# EAGLE board transmitter receiver (EAGLE 6.5.0)
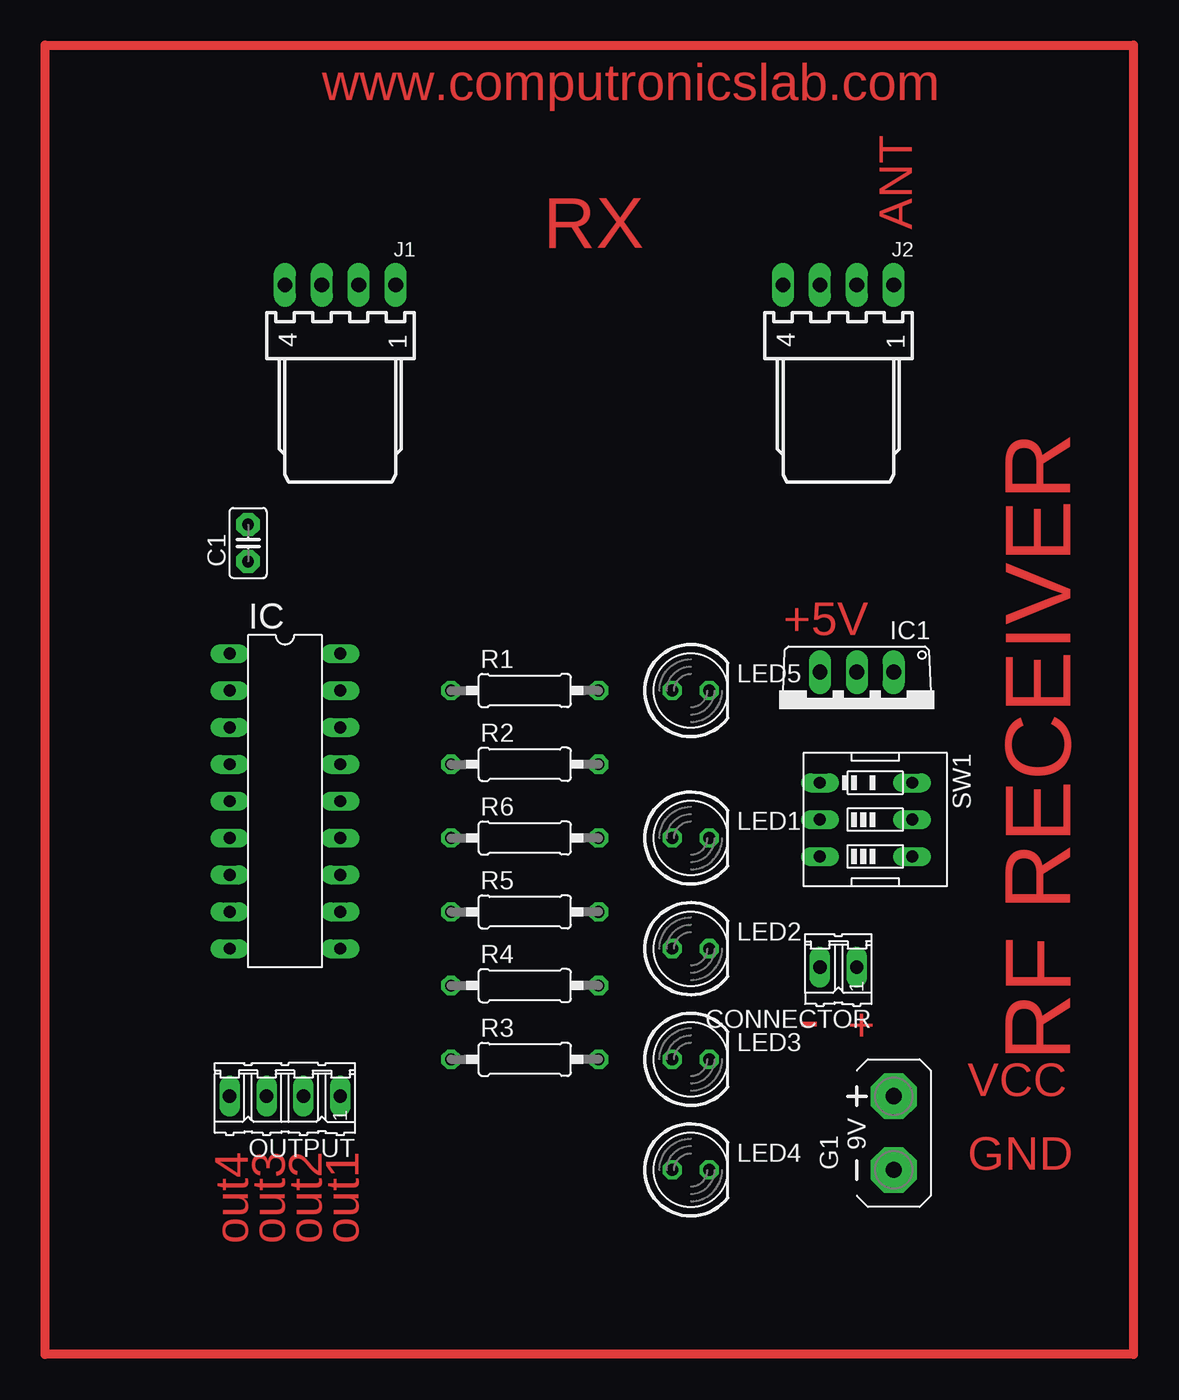
[diagram p0: board, top side]
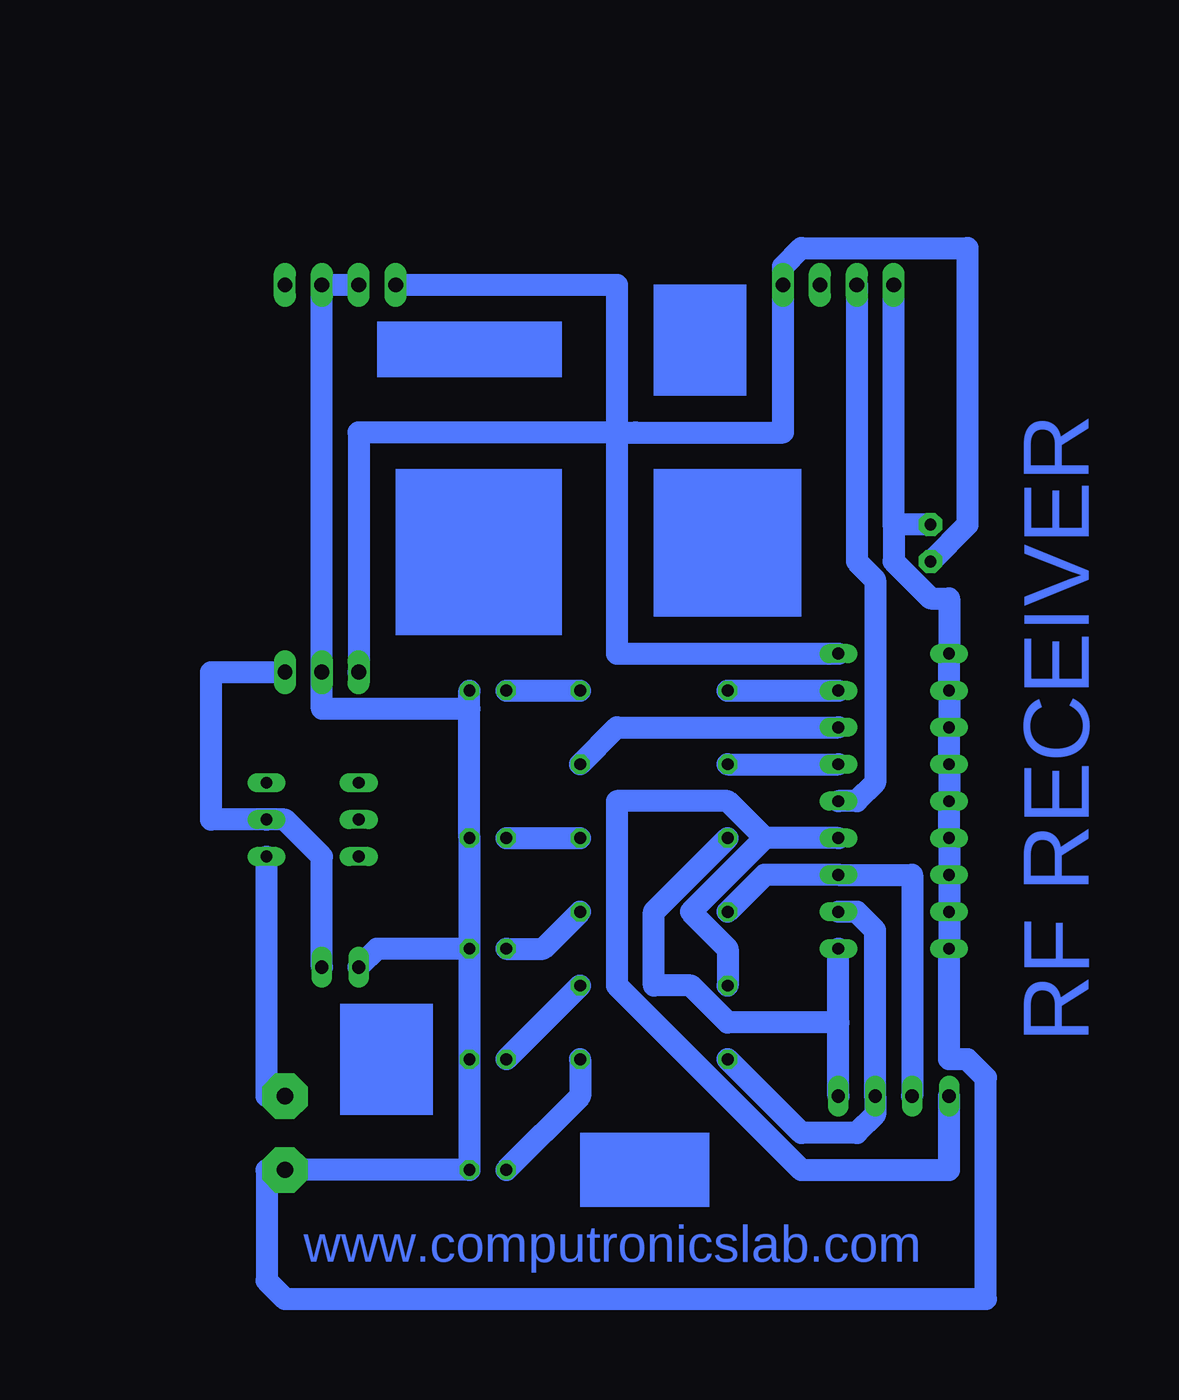
[diagram p1: board, bottom side, seen from below]

No outline drawn. Coordinates in mm, seen from the top.
Copper layers (1*16): Top 0.035mm / dielectric 1.5mm / Bottom 0.035mm
Design rules "default *": minimum track width 60mil, minimum drill 24mil, track to track 8mil, track to pad 8mil, pad to pad 8mil, via to via 8mil, smd to smd 8mil, copper to edge 40mil, drill to drill 8mil, minimum pad ring 10mil, minimum via ring 8mil, stop-mask expansion 4mil, vias tented up to drill 0mil, thermal gap 10mil

## Footprints (pad centres in the part's own frame; a part is rotated, then mirrored left to right if it is on the bottom)
C2.5-2 = drill 0.813 pad 1.6 octagon: 1 -1.27,0; 2 1.27,0
02P = drill 0.914 long: 1 -1.27,0; 2 1.27,0
AB9V = drill 1.118 pad 3.15 octagon: + 0,2.54; - 0,-2.54
DIL18 = drill 0.813 long: 1 -10.16,-3.81; 2 -7.62,-3.81; 3 -5.08,-3.81; 4 -2.54,-3.81; 5 0,-3.81; 6 2.54,-3.81; 7 5.08,-3.81; 8 7.62,-3.81; 9 10.16,-3.81; 10 10.16,3.81; 11 7.62,3.81; 12 5.08,3.81; 13 2.54,3.81; 14 0,3.81; 15 -2.54,3.81; 16 -5.08,3.81; 17 -7.62,3.81; 18 -10.16,3.81
TO220V = drill 1.016 long: 1 -2.54,-2.54; 2 0,-2.54; 3 2.54,-2.54
7395-04 = drill 1.016 long: 1 3.81,0; 2 1.27,0; 3 -1.27,0; 4 -3.81,0
LED5MM = drill 0.813 octagon: A -1.27,0; K 1.27,0
04P = drill 0.914 long: 1 -3.81,0; 2 -1.27,0; 3 1.27,0; 4 3.81,0
0207/10 = drill 0.813 octagon: 1 -5.08,0; 2 5.08,0
EDG-03 = drill 0.813 long: 1 -2.54,-3.81; 2 0,-3.81; 3 2.54,-3.81; 4 2.54,2.54; 5 0,2.54; 6 -2.54,2.54

## Placement (x,y rotation side)
C1  .01uf (103)  [C2.5-2]  24.13,58.42 90 top
CONNECTOR  2 pin  [02P]  64.77,29.21 180 top
G1  AB9V  [AB9V]  68.58,17.78 0 top
IC  HT12D  [DIL18]  26.67,40.64 270 top
IC1  7805TV  [TO220V]  66.04,46.99 180 top
J1  female conn  [7395-04]  30.48,76.2 0 top
J2  female conn  [7395-04]  64.77,76.2 0 top
LED1  5mm  [LED5MM]  54.61,38.1 0 top
LED2  5mm  [LED5MM]  54.61,30.48 0 top
LED3  5mm  [LED5MM]  54.61,22.86 0 top
LED4  5mm  [LED5MM]  54.61,15.24 0 top
LED5  5mm  [LED5MM]  54.61,48.26 0 top
OUTPUT  4 pin  [04P]  26.67,20.32 180 top
R1  330E  [0207/10]  43.18,48.26 0 top
R2  47K  [0207/10]  43.18,43.18 0 top
R3  330E  [0207/10]  43.18,22.86 0 top
R4  330E  [0207/10]  43.18,27.94 0 top
R5  330E  [0207/10]  43.18,33.02 0 top
R6  330E  [0207/10]  43.18,38.1 0 top
SW1  on/off switch  [EDG-03]  67.31,39.37 270 top

## Library data of the parts
C1 = capacitor-wima
CONNECTOR OUTPUT = con-amp-quick; OC_FARNELL: unknown; OC_NEWARK: unknown
G1 = battery
IC = microchip
IC1 = linear
J1 J2 = con-molex; OC_FARNELL: unknown; OC_NEWARK: unknown
LED1-LED5 = led
R1-R6 = eagle-ltspice; SPICEMODEL: NONE; SPICEPREFIX: R
SW1 = special

## Nets
FEMALECONN: IC.14 J1.3
N$1: LED3.A R4.2
N$2: LED2.A R5.2
N$3: LED4.A R3.2
N$4: LED1.A R6.2
N$5: IC.15 R2.1
N$6: IC.17 R1.1
N$7: LED5.A R1.2
N$8: IC.13 OUTPUT.4 R4.1
N$9: IC.12 OUTPUT.3 R5.1
N$10: IC.11 OUTPUT.2 R3.1
N$11: IC.10 OUTPUT.1 R6.1
N$12: C1.1 IC1.3 IC.18 J1.1 J2.4
N$15: C1.2 CONNECTOR.2 G1.- IC1.2 IC.1 IC.2 IC.3 IC.4 IC.5 IC.6 IC.7 IC.8 IC.9 J1.4 J2.2 J2.3 LED1.K LED2.K LED3.K LED4.K LED5.K
N$16: G1.+ SW1.4
N$17: CONNECTOR.1 IC1.1 SW1.5
N$18: IC.16 R2.2

## Tracks (layer width: path | path; a pad name or v marks a point on that pad's centre or on a via)
FEMALECONN
  Bottom 1.524: IC.14 29.21,40.64 27.94,41.91 27.94,55.88 29.21,57.15 J1.3
N$1
  Bottom 1.524: R4.2 LED3.A
N$2
  Bottom 1.524: R5.2 50.8,30.48 LED2.A
N$3
  Bottom 1.524: LED4.A 48.26,20.32 R3.2
N$4
  Bottom 1.524: LED1.A R6.2
N$5
  Bottom 1.524: R2.1 IC.15
N$6
  Bottom 1.524: R1.1 IC.17
N$7
  Bottom 1.524: LED5.A R1.2
N$8
  Bottom 1.524: R4.1 38.1,30.48 40.64,33.02 35.56,38.1 | IC.13 35.56,38.1 | OUTPUT.4 22.86,15.24 33.02,15.24 45.72,27.94 45.72,40.64 38.1,40.64 35.56,38.1
N$9
  Bottom 1.524: R5.1 35.56,35.56 IC.12 25.4,35.56 OUTPUT.3
N$10
  Bottom 1.524: IC.11 29.21,33.02 27.94,31.75 OUTPUT.2 27.94,19.05 29.21,17.78 33.02,17.78 R3.1
N$11
  Bottom 1.524: OUTPUT.1 30.48,25.4 | 30.48,25.4 IC.10 | R6.1 43.18,33.02 43.18,27.94 40.64,27.94 38.1,25.4 30.48,25.4
N$12
  Bottom 1.524: 45.72,66.04 45.72,76.2 55.88,76.2 J2.4 | 45.72,66.04 45.72,50.8 IC.18 | 45.72,66.04 63.5,66.04 IC1.3 | 45.72,66.04 44.45,66.04 34.29,66.04 34.29,68.58 J1.1 34.29,77.47 33.02,78.74 21.59,78.74 21.59,59.69 C1.1
N$14
  Top 0.61: 10.16,92.71 85.09,92.71 85.09,2.54 10.16,2.54 10.16,92.71
N$15
  Bottom 1.524: 26.67,59.69 J1.4 | C1.2 26.67,59.69 | 26.67,59.69 26.67,57.15 24.13,54.61 22.86,54.61 IC.1 IC.2 IC.3 IC.4 IC.5 IC.6 IC.7 IC.8 IC.9 22.86,22.86 21.59,22.86 20.32,21.59 20.32,6.35 68.58,6.35 69.85,7.62 69.85,15.24 G1.- LED4.K LED3.K LED2.K | J2.3 J2.2 IC1.2 66.04,46.99 55.88,46.99 | LED2.K LED1.K 55.88,46.99 | 55.88,46.99 LED5.K | CONNECTOR.2 62.23,30.48 LED2.K
N$16
  Bottom 1.524: SW1.4 69.85,20.32 G1.+
N$17
  Bottom 1.524: CONNECTOR.1 66.04,36.83 68.58,39.37 SW1.5 73.66,39.37 73.66,49.53 IC1.1
N$18
  Bottom 1.524: IC.16 45.72,45.72 R2.2
(copper drawn outside any net)
  shapes: Bottom area x6

## Text on the board
Top: www.computronicslab.com | ANT | RX | RF RECEIVER | +5V | - | + | VCC | GND | out4 | out3 | out2 | out1
Bottom: RF RECEIVER | www.computronicslab.com